# Altium PCB Glucometer-I.C.- Full V1.PcbDoc
Units mm, origin at the board's own origin, x right, y up, seen from the top; angles counter-clockwise.
Board outline 38.25 x 38.25 mm, 2 copper layers (Top Layer, Bottom Layer); 27 components, 32 nets, 123 pads, 22 vias.
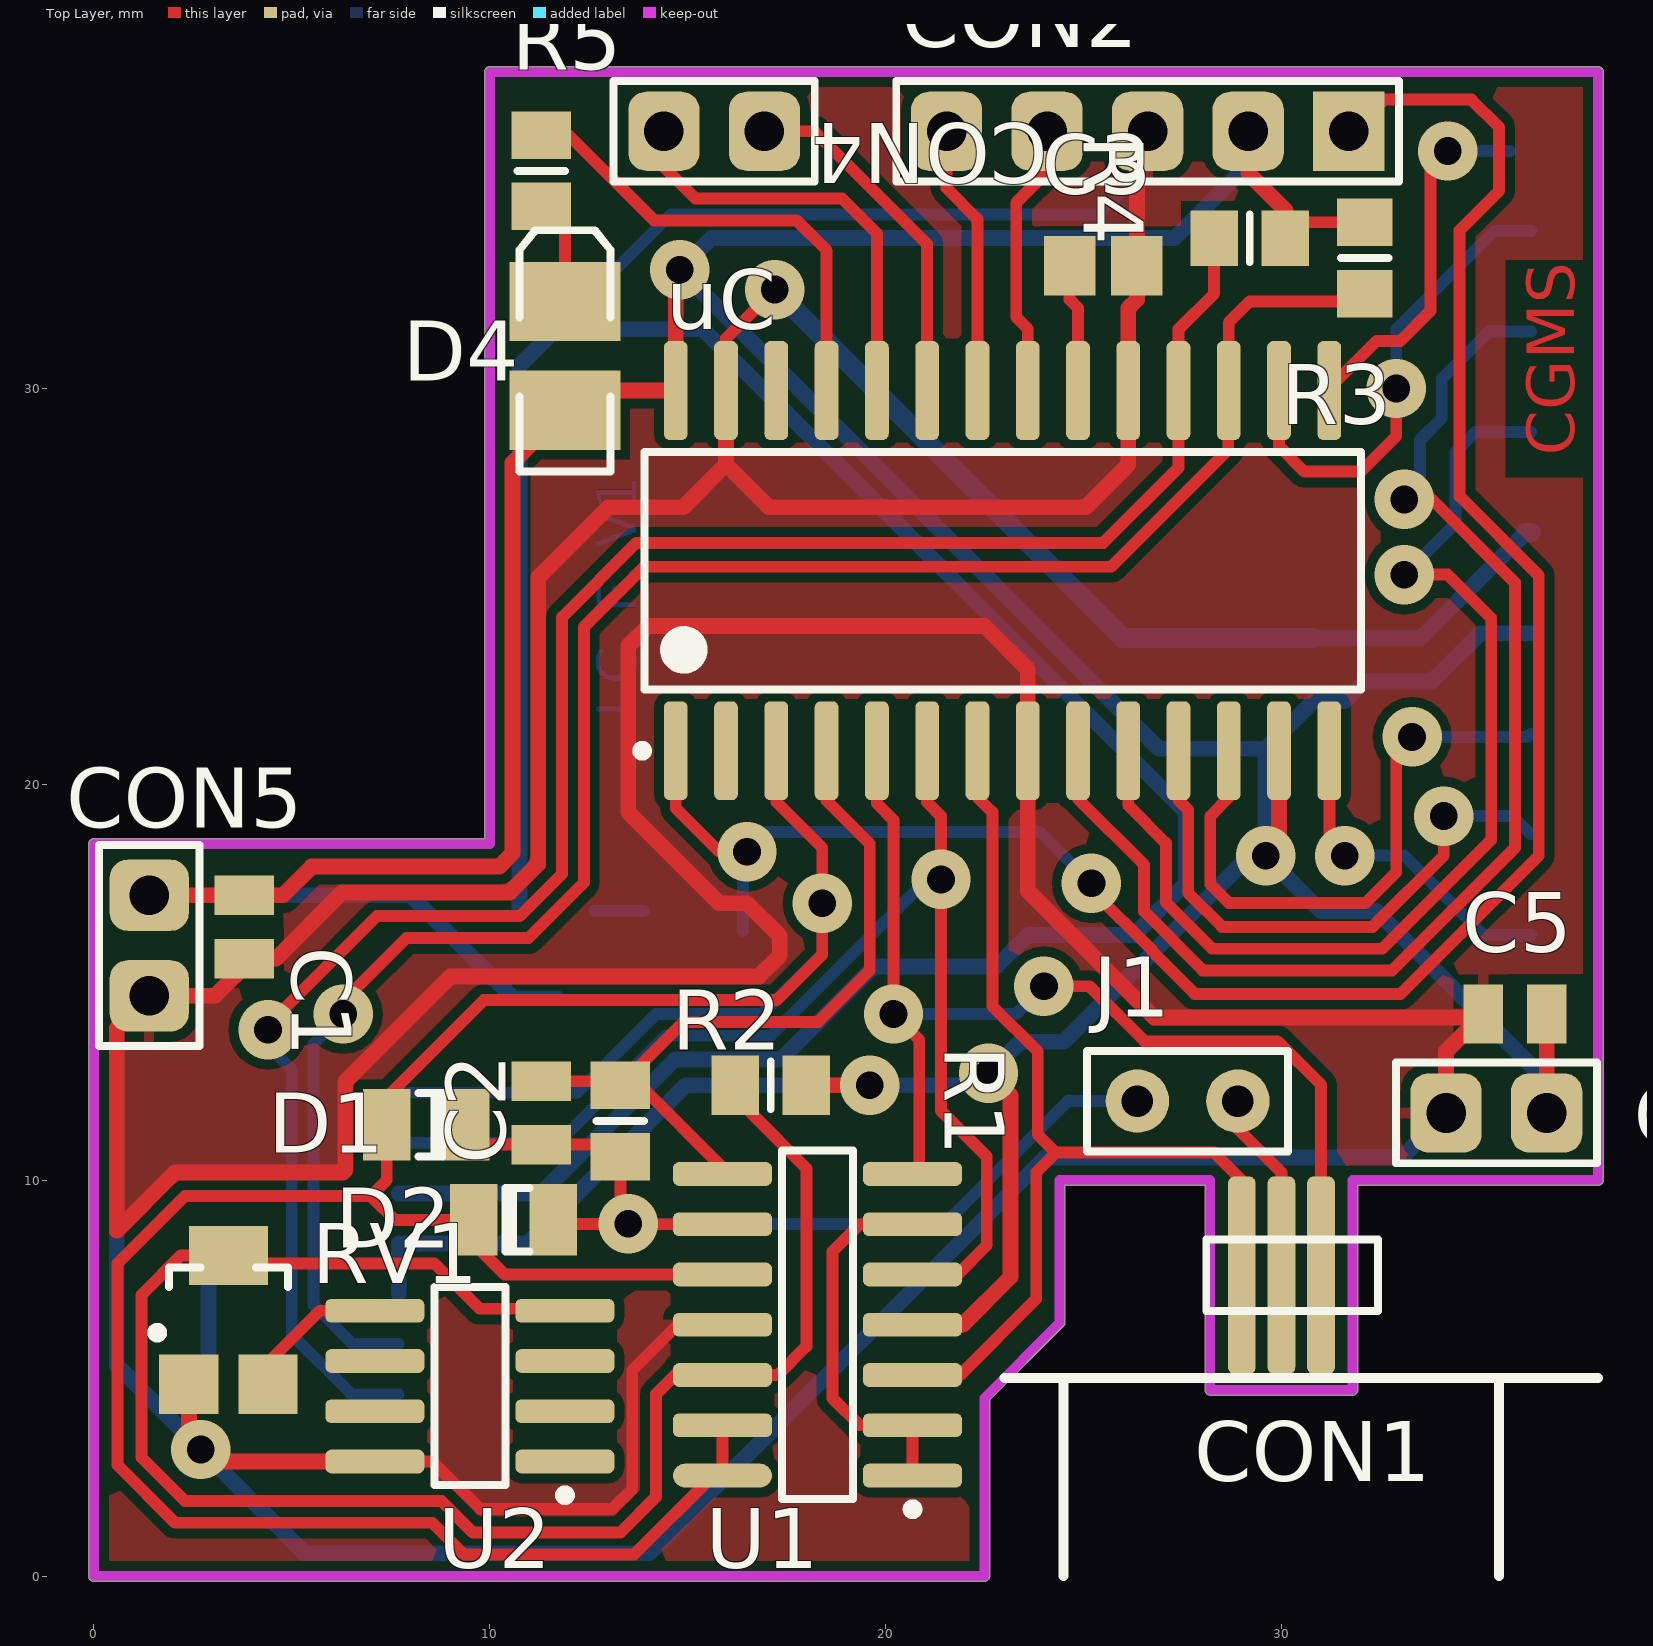
[diagram p0: Top Layer view]
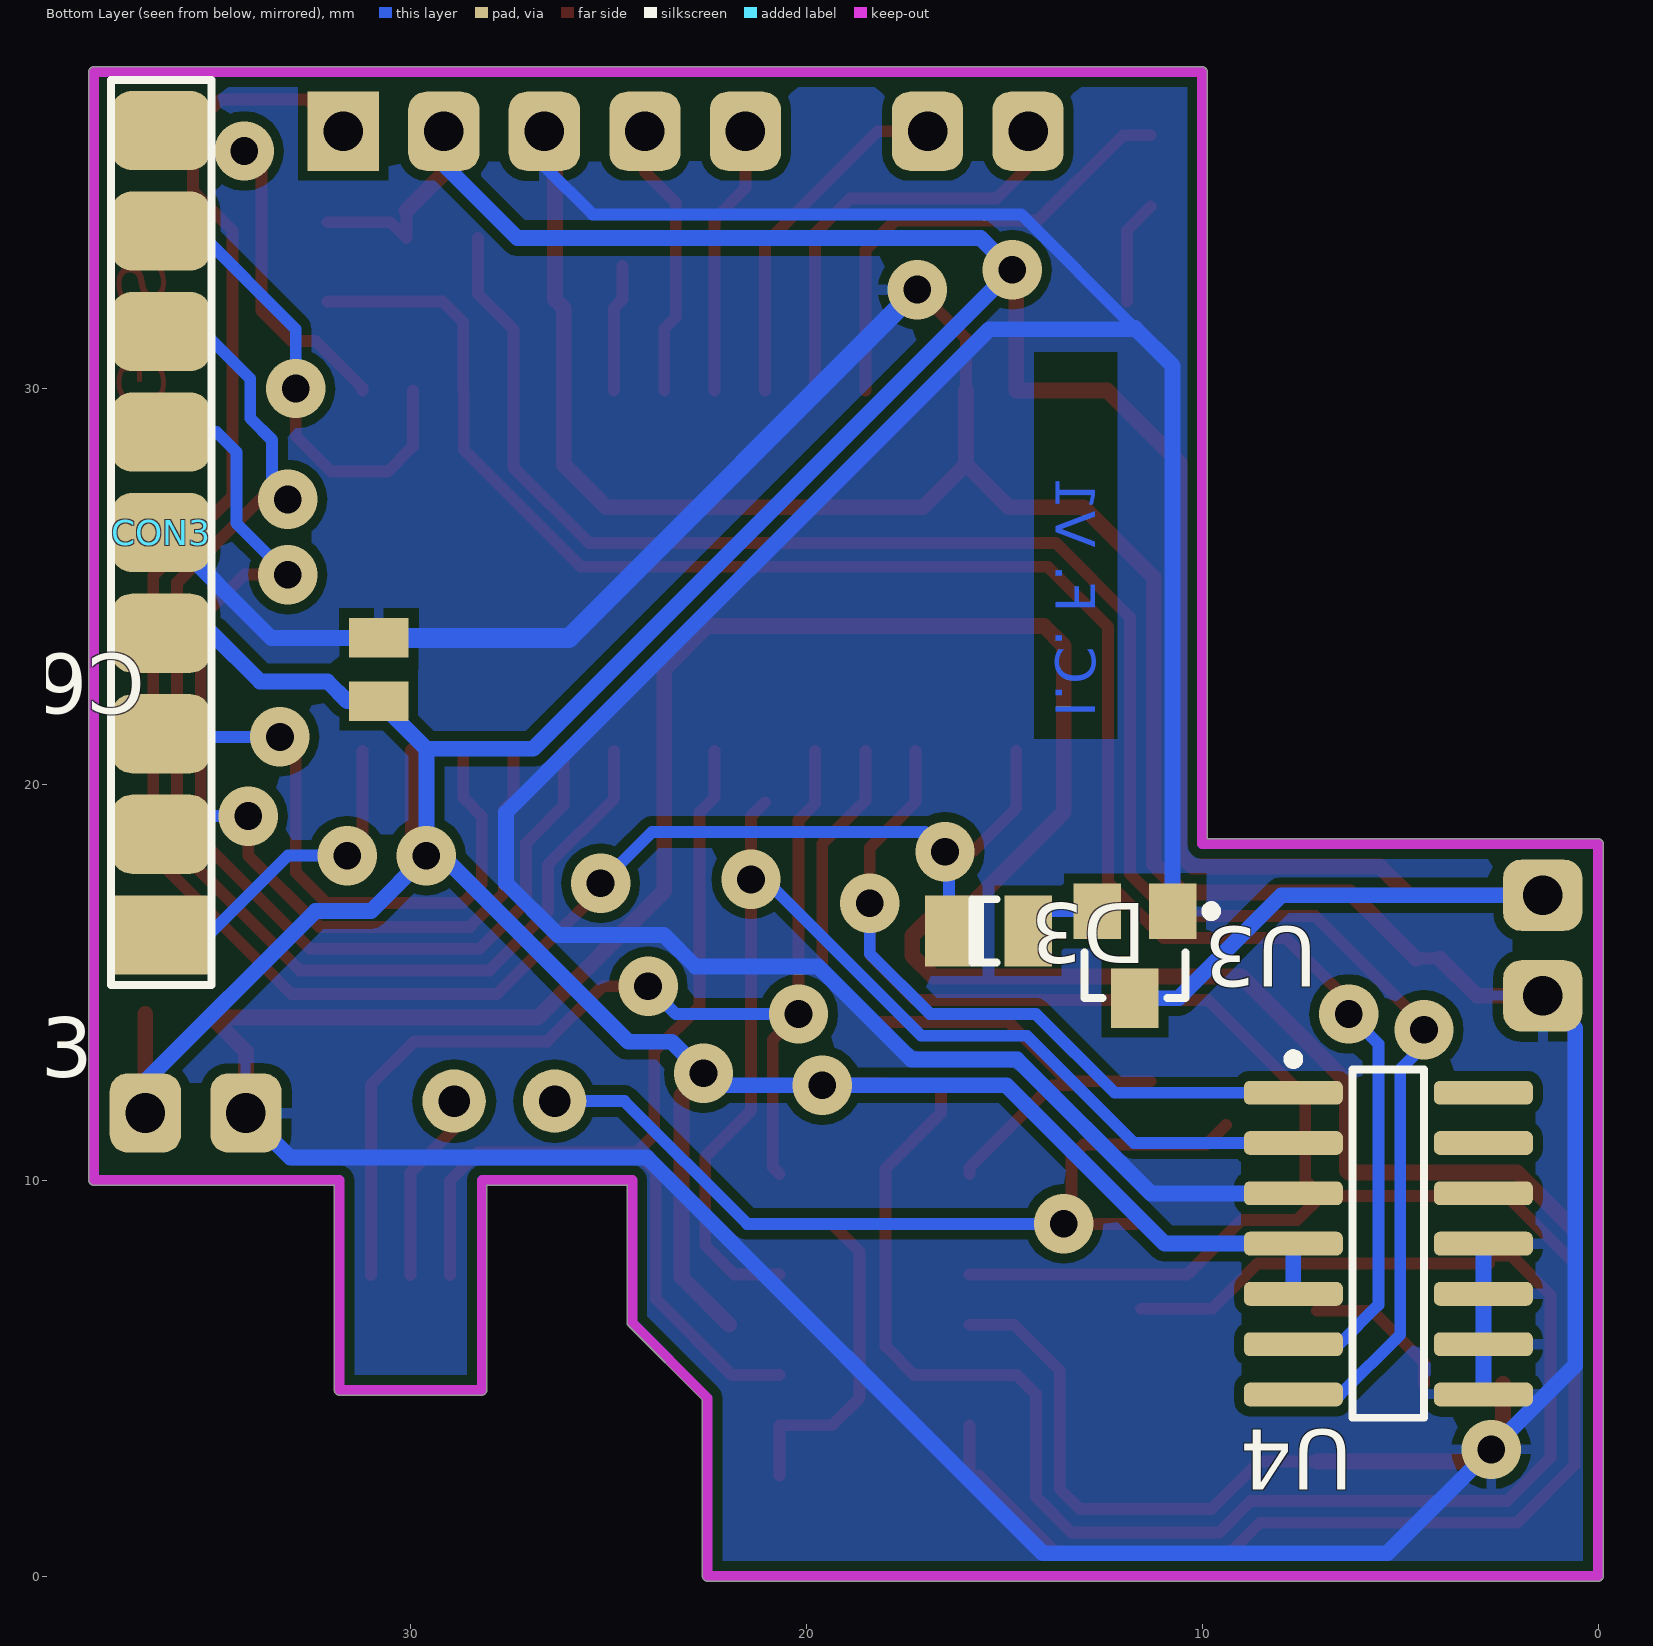
[diagram p1: Bottom Layer view, seen from below]

## Layer stack, top to bottom
Top Layer: signal copper 0.0356
Dielectric: dielectric 0.32, FR-4, Dk 4.8
Bottom Layer: signal copper 0.0356

## Board outline
-0.127,0 ccw(c0,0) 0,-0.127 22.5,-0.127 ccw(c22.5,0) 22.627,0 22.627,4.447 24.49,6.31 24.49,6.309 ccw(c24.4,6.4) 24.527,6.4 24.527,9.873 28.073,9.873 28.073,4.7 ccw(c28.2,4.7) 28.2,4.573 31.8,4.573 ccw(c31.8,4.7) 31.927,4.7 31.927,9.873 38,9.873 ccw(c38,10) 38.127,10 38.127,38 ccw(c38,38) 38,38.127 10,38.127 ccw(c10,38) 9.873,38 9.873,18.627 0,18.627 ccw(c0,18.5) -0.127,18.5

## Design rules (kind name [scope] priority, off if disabled: settings)
AssemblyTestPointUsage AssemblyTestPointUsage_1 [All] p2:
AssemblyTestpoint AssemblyTestpoint_1 [All] p2: testpointundercomponent=TRUE minsize=1.016 maxsize=2.54 preferedsize=1.524 minholesize=0 maxholesize=1.016 preferedholesize=0.813 testpointgrid=0.025 usegrid=TRUE gridtolerance=0 allowsidetop=TRUE allowsidebottom=TRUE
Clearance [All] p1: gap=0.25
ComponentClearance ComponentClearance_1 [All] p2: gap=0.254 collisioncheckmode=3 verticalgap=0.254 showdistances=FALSE
DiffPairsRouting DiffPairsRouting_1 [All] p2: maxlimit=0.254 minlimit=0.254 mostfreqgap=0.254 maxuncoupledlength=12.7
FabricationTestPointUsage TestPointUsage [All] p2: valid=0 allowmultiple=FALSE
FabricationTestpoint Testpoint [All] p2: side=3 testpointundercomponent=TRUE minsize=1.016 maxsize=2.54 preferedsize=1.524 minholesize=0 maxholesize=1.016 preferedholesize=0.813 testpointgrid=0.025 allowsidetop=TRUE allowsidebottom=TRUE usegrid=TRUE gridtolerance=0
FanoutControl Fanout_LCC [IsLCC] p1: bgadir=Out bgaviamode=Centered fanoutstyle=Auto fanoutdirection=Alternating viagrid=0.025 // Fanout_LCC (Default Rule)
FanoutControl Fanout_BGA [IsBGA] p2: bgadir=Out bgaviamode=Centered fanoutstyle=Auto fanoutdirection=Alternating viagrid=0.025 // Fanout_BGA (Default Rule)
FanoutControl Fanout_Default [All] p4: bgadir=Out bgaviamode=Centered fanoutstyle=Auto fanoutdirection=Alternating viagrid=0.025 // Fanout_Default (Default Rule)
FanoutControl Fanout_Small [(CompPinCount < 5)] p5: bgadir=Out bgaviamode=Centered fanoutstyle=Auto fanoutdirection=OutThenIn viagrid=0.025 // Fanout_Small (Default Rule)
FanoutControl Fanout_BGA_1 [IsBGA] p6: bgadir=Out bgaviamode=Centered fanoutstyle=Auto fanoutdirection=Alternating viagrid=0.025 // Fanout_BGA (Default Rule)
FanoutControl Fanout_LCC_1 [IsLCC] p7: bgadir=Out bgaviamode=Centered fanoutstyle=Auto fanoutdirection=Alternating viagrid=0.025 // Fanout_LCC (Default Rule)
FanoutControl Fanout_SOIC_1 [IsSOIC] p8: bgadir=Out bgaviamode=Centered fanoutstyle=Auto fanoutdirection=Alternating viagrid=0.025 // Fanout_SOIC (Default Rule)
FanoutControl Fanout_Small_1 [(CompPinCount < 5)] p9: bgadir=Out bgaviamode=Centered fanoutstyle=Auto fanoutdirection=OutThenIn viagrid=0.025 // Fanout_Small (Default Rule)
FanoutControl Fanout_Default_1 [All] p10: bgadir=Out bgaviamode=Centered fanoutstyle=Auto fanoutdirection=Alternating viagrid=0.025 // Fanout_Default (Default Rule)
Height Height_1 [All] p2: minheight=0 maxheight=25.4 prefheight=12.7
HoleSize [All] p1: absolutevalues=TRUE maxlimit=5 minlimit=0.025 maxpercent=80.000 minpercent=20.000
HoleSize HoleSize_1 [All] p2: absolutevalues=TRUE maxlimit=5 minlimit=0.025 maxpercent=80.000 minpercent=20.000
HoleToHoleClearance HoleToHoleClearance_1 [All] p2: gap=0.254 allowstackedmicrovias=TRUE
LayerPairs LayerPairs_1 [All] p2: enforce=TRUE
MinimumSolderMaskSliver MinimumSolderMaskSliver_1 [All] p2: minsoldermaskwidth=0.254
NetAntennae NetAntennae_1 [All] p2: netantennaetolerance=0
PasteMaskExpansion PasteMaskExpansion_1 [All] p2: expansion=0
PlaneClearance PlaneClearance_1 [All] p2: clearance=0.508
PolygonConnect [All] p1: connectstyle=Relief reliefconductorwidth=0.254 reliefentries=4 polygonreliefangle="90 Angle" airgapwidth=0.254
PolygonConnect PolygonConnect_1 [All] p2: connectstyle=Relief reliefconductorwidth=0.254 reliefentries=4 polygonreliefangle="90 Angle" airgapwidth=0.254
RoutingPriority RoutingPriority_1 [All] p2: routingpriority=0
RoutingTopology RoutingTopology_1 [All] p2: topology=Shortest
RoutingVias [All] p1: holewidth=0.8 width=1.5 viastyle="Through Hole" minholewidth=0.7 minwidth=1 maxholewidth=1 maxwidth=2
ShortCircuit ShortCircuit_1 [All] p2: allowed=FALSE
SilkToSilkClearance SilkToSilkClearance_1 [All] p2: silktosilkclearance=0.254
SilkToSolderMaskClearance SilkscreenOverComponentPads [IsPad] p2: minsilkscreentomaskgap=0.254 clearancetoexposedcopper=TRUE
SolderMaskExpansion [All] p1: expansion=0.102
SolderMaskExpansion SolderMaskExpansion_1 [All] p2: expansion=0.102
UnRoutedNet UnRoutedNet_1 [All] p2:
Width [All] p1: maxlimit=5 minlimit=0.25 preferedwidth=0.3 minimp=50.000000 maximp=50.000000 favimp=50.000000
23 further rules are at their usual default settings.

## Components (designator, comment, footprint, x,y, rotation, side; value= is the part's Value field where it differs from the comment)
C1 "Cap2" CAPC1608N 3.8,16.4 r270 top
C2 "Cap2" CAPC1608N 11.3,11.7 r90 top
C3 "Cap" CAPC2012N 25.5,33.1 r180 top
C5 "Cap" CAPC1608N 35.9,14.2 r0 top
C6 "Cap" CAPC1608N 30.8,22.9 r270 bottom
CON1 "MHDR1X3" MHDR1X3 29,7.6 r0 top
CON2 "Header 5" HDR1X5 31.7,36.5 r180 top
CON3 "Header 9" HDR1X9 36.3,16.2 r90 bottom
CON4 "Header 2" HDR1X2#1 14.4,36.5 r0 top
CON5 "Header 2" HDR1X2#1 1.4,17.2 r270 top
CON6 "Header 2" HDR1X2#1 36.7,11.7 r180 top
D1 "1N4148" CD3216-1206#1 8.5,11.4 r0 top
D2 "1N4148" CD3216-1206#2 10.7,9 r180 top
D3 "1N4148" CD3216-1206#1 15.5,16.3 r0 bottom
D4 "LED2" 3.2X1.6X1.1 11.9,30.8 r90 top
J1 "Header 2" HDR1X2#2 28.9,12 r180 top
R1 "Res1" RESC2012N#1 17.1,12.4 r0 top
R2 "Res1" RESC2012N#1 13.3,11.5 r270 top
R3 "Res1" RESC2012N#2 32.1,33.3 r270 top
R4 "Res1" RESC2012N#2 29.2,33.8 r180 top
R5 "Res1" RESC2012N#1 11.3,35.5 r270 top
RV1 "RPot" SOT23-3N 3.4,7.1 r90 top
U1 "LMC6044IN" M14A_N 18.28,6.35 r180 top
U2 "LM385BM" M08A_N 9.5,4.8 r180 top
U3 "Supply Voltage Supervisor" SOT23 11.7,15.7 r0 bottom
U4 "AD5241" R-14_N 5.3,8.4 r180 bottom
uC "PIC24FJ64GA102-I/SO" SOIC-SO28_N 22.955,25.4 r90 top

## Footprints (in the part's own frame and the unit in brackets; to place one, negate y for a bottom-side part, rotate by r counter-clockwise, add the part's x,y. Pads: shape width x height; smd on the part's side, far side on the other; paste and mask are expansions set on the pad)
3.2X1.6X1.1 [mm] "SMT LED; 2 Flat Leads"
  rect 2x2.8 smd: 1(-1.35,0) 2(1.4,0)
  silkscreen extent -2.9,-1.15 3.2,1.15
CAPC1608N [mm] "Chip Capacitor, Body 1.6x0.8mm, IPC Medium Density"
  rect 1x1.5 smd: 1(-0.8,0) 2(0.8,0)
  body extent -0.87,-0.48 0.87,0.48, height 0.85
CAPC2012N [mm] "Chip Capacitor, Body 2.0x1.3mm, IPC Medium Density"
  rect 1.3x1.5 smd: 1(-0.85,0) 2(0.85,0)
  body extent -1.1,-0.72 1.1,0.72, height 1.1
CD3216-1206#1 [mm] "Chip Diode; Body 3.2 x 1.6 mm (LxW typ)"
  rect 1.2x1.8 smd: 1(-1.1,0) 2(0.9,0)
  silkscreen extent -0.3,-0.8 0.3,0.8
CD3216-1206#2 [mm] "Chip Diode; Body 3.2 x 1.6 mm (LxW typ)"
  rect 1.2x1.8 smd: 1(-0.9,0) 2(1.1,0)
  silkscreen extent -0.3,-0.8 0.3,0.8
HDR1X2#1 [mm] "Connector; Header; 2 Position"
  rrect50% 1.8x2 hole 1: 1(0,0) 2(2.54,0)
  silkscreen extent -1.27,-1.27 3.81,1.27
HDR1X2#2 [mm] "Connector; Header; 2 Position"
  round 1.6 hole 0.8: 1(0,0) 2(2.54,0)
  silkscreen extent -1.27,-1.27 3.81,1.27
HDR1X5 [mm] "Connector; Header; 5 Position"
  rect 1.8x2 hole 1: 1(0,0)
  rrect50% 1.8x2 hole 1: 2(2.54,0) 3(5.08,0) 4(7.62,0) 5(10.16,0)
  silkscreen extent -1.27,-1.27 11.43,1.27
HDR1X9 [mm] "Connector; Header; 9 Position"
  rect 2x2.5 smd: 1(0,0)
  rrect50% 2x2.5 smd: 2(2.54,0) 3(5.08,0) 4(7.62,0) 5(10.16,0) 6(12.7,0) 7(15.24,0) 8(17.78,0) 9(20.32,0)
  silkscreen extent -1.27,-1.27 21.59,1.27
M08A_N [mm] "SOIC, 8-Leads, Body 4.9x3.9mm, Pitch 1.27mm, IPC Medium Density"
  rrect50% 2.5x0.6 smd: 1(-2.4,1.905) 2(-2.4,0.635) 3(-2.4,-0.635) 4(-2.4,-1.905) 5(2.4,-1.905) 6(2.4,-0.635) 7(2.4,0.635) 8(2.4,1.905)
  silkscreen extent -2.53,-2.5 0.9,2.88, body extent -2,-2.5 2,2.5, height 1.75
M14A_N [mm] "SOIC, 14-Leads, Body 8.6x3.9mm, Pitch 1.27mm, IPC Medium Density"
  rrect50% 2.5x0.6 smd: 1(-2.4,3.81) 2(-2.4,2.54) 3(-2.4,1.27) 4(-2.4,0) 5(-2.4,-1.27) 6(-2.4,-2.54) 7(-2.4,-3.81) 8(2.4,-3.81) 9(2.4,-2.54) 10(2.4,-1.27) 11(2.4,0) 12(2.4,1.27) 13(2.4,2.54)
  oval 2.5x0.6 smd: 14(2.4,3.81)
  silkscreen extent -2.53,-4.4 0.9,4.78, body extent -2,-4.38 2,4.38, height 1.75
MHDR1X3 [mm] "Connector; Header; 3 Position"
  rrect50% 0.7x5 smd: 1(0,0) 2(1,0) 3(2,0)
  silkscreen extent -0.9,-0.9 3.44,0.9
R-14_N [mm] "14-Pin Narrow Body Small Outline Integrated Circuit 1.27 mm Pitch, IPC Medium Density"
  rrect50% 2.5x0.6 smd: 1(-2.4,3.81) 2(-2.4,2.54) 3(-2.4,1.27) 4(-2.4,0) 5(-2.4,-1.27) 6(-2.4,-2.54) 7(-2.4,-3.81) 8(2.4,-3.81) 9(2.4,-2.54) 10(2.4,-1.27) 11(2.4,0) 12(2.4,1.27) 13(2.4,2.54) 14(2.4,3.81)
  silkscreen extent -2.53,-4.4 0.9,4.78, body extent -1.95,-4.33 1.95,4.33, height 1.75
RESC2012N#1 [mm] "Chip Resistor, Body 2.0x1.3mm, IPC Medium Density"
  rect 1.2x1.5 smd: 1(-0.9,0) 2(0.9,0)
  silkscreen extent 0,-0.6 0,0.6, body extent -1.07,-0.7 1.07,0.7, height 0.65
RESC2012N#2 [mm] "Chip Resistor, Body 2.0x1.3mm, IPC Medium Density"
  rect 1.2x1.4 smd: 1(-0.9,0) 2(0.9,0)
  silkscreen extent 0,-0.6 0,0.6, body extent -1.07,-0.7 1.07,0.7, height 0.65
SOIC-SO28_N [mm] "SOIC, 28-Leads, Body 17.9x7.5mm, Pitch 1.27mm, IPC Medium Density"
  rrect50% 2.5x0.6 smd: 1(-4.55,8.255) 2(-4.55,6.985) 3(-4.55,5.715) 4(-4.55,4.445) 5(-4.55,3.175) 6(-4.55,1.905) 7(-4.55,0.635) 8(-4.55,-0.635) 9(-4.55,-1.905) 10(-4.55,-3.175) 11(-4.55,-4.445) 12(-4.55,-5.715) 13(-4.55,-6.985) 14(-4.55,-8.255) 15(4.55,-8.255) 16(4.55,-6.985) 17(4.55,-5.715) 18(4.55,-4.445) 19(4.55,-3.175) 20(4.55,-1.905) 21(4.55,-0.635) 22(4.55,0.635) 23(4.55,1.905) 24(4.55,3.175) 25(4.55,4.445) 26(4.55,5.715) 27(4.55,6.985) 28(4.55,8.255)
  silkscreen extent -4.67,-9.05 3,9.23, body extent -3.8,-9.06 3.8,9.06, height 2.65
SOT23 [mm] "SOT-23; 3 Leads; Body 3.0 x 2.6 mm, inc. leads (LxW max)"
  rect 1.2x1.4 smd: 1(-0.95,-1.1) 2(0.95,-1.1)
  rect 1.2x1.5 smd: 3(0,1.1)
  silkscreen extent -2.05,-1.22 1.28,1.1
SOT23-3N [mm] "SOT23, 3-Leads, Body 2.9x1.3mm, Pitch 0.95mm, Lead Span 2.5mm, IPC Medium Density"
  rect 1.5x1.5 smd: 1(-2.25,1) 2(-2.25,-1)
  rect 1.5x2 smd: 3(1,0)
  silkscreen extent -1.07,-1.5 0.7,1.92, body extent -0.7,-1.5 0.7,1.5, height 1.1

## Part data
C1 C2 C3 C5 C6: "Capacitor"
CON1: "Header, 3-Pin"
CON2: "Header, 5-Pin"
CON3: "Header, 9-Pin"
CON4 CON5 CON6 J1: "Header, 2-Pin"
D1 D2 D3: "High Conductance Fast Diode"
D4: "Typical RED, GREEN, YELLOW, AMBER GaAs LED"
R1 R2 R3 R4 R5: "Resistor"
RV1: "Potentiometer"
U1: "CMOS Quad Micropower Operational Amplifier, 14-pin MDIP"
U2: "Adjustable Micropower Voltage Reference, 8-pin Narrow SOIC"
U4: "AD5241BR"
uC: "General purpose 16-bit Flash Microcontroller with nanoWatt XLP, 64KB Flash, 8KB SRAM, 28-Pin SOIC, Industrial Temperature"

## Via types
v1: diameter 1.5, hole 0.7, Top Layer to Bottom Layer, 22 vias

## Nets (pads, with @x,y where several pads share a name; then routed paths per layer and width w, separated by ;. In a path a pad name is that pad's centre, name@x,y a point inside that pad or via, vN(x,y) a via of type N, cw(c..) or ccw(c..) an arc to the next point about the centre after c; other vN are vias at no path point)
3.3V: C1.1 C5.2 C6.2 CON2.2 CON3.4 CON5.1 CON6.1 D4.1 R1.2 R3.1 R4.1 U1.4 U3.3 U4.4 U4.5 uC.13 uC.28 | length 142.3
  Top Layer w0.3: 29.16,35.44 CON2.2 ; 30.1,34.5 R4.1 30.5,34.2 R3.1
  Top Layer w0.4: CON5.1 4,17.2 4.777,17.2 5.5,17.923 10.239,17.923 10.577,18.261 10.577,28.127 D4.1 12.4,29.95 uC.28 14.7,32.9 v1(14.8,33) ; R1.2 v1(19.6,12.4) ; 21.95,6.35 23.155,7.555 23.155,12.145 v1(22.6,12.7) ; 29.16,35.44 30.1,34.5 ; v1(29.6,18.2) 29.94,18.54 uC.13 ; CON6.1 C5.2
  Bottom Layer w0.4: CON5.1 8,17.2 10.6,14.6 U3.3 ; U4.5 U4.4 10.949,8.4 14.949,12.4 v1(19.6,12.4) 22.3,12.4 v1(22.6,12.7) 23.4,13.5 24.5,13.5 29.2,18.2 v1(29.6,18.2) ; CON2.2 29.16,35.66 27.3,33.8 15.6,33.8 v1(14.8,33) 26.9,20.9 29.6,20.9 ; CON3.4 35.02,23.82 33.8,22.6 32.1,22.6 31.6,22.1 C6.2 29.6,20.9 ; CON6.1 36.7,12.5 32.4,16.8 31,16.8 v1(29.6,18.2) ; v1(29.6,18.2) 29.6,20.9
CNT: CON1.3 U1.7 uC.5 | length 28.1
  Top Layer w0.3: uC.5 19.78,19.52 20.2,19.1 v1(20.2,14.2) 20.85,13.55 20.85,10.33 U1.7 ; v1(24,14.9) 25.151,14.9 26.541,13.51 29.9,13.51 31,12.41 CON1.3
  Bottom Layer w0.3: v1(20.2,14.2) 23.3,14.2 v1(24,14.9)
CSCON: CON3.7 uC.9 | length 32.6
  Top Layer w0.3: uC.9 24.86,19.64 26.531,17.969 26.531,16.792 28,15.322 28,15.3 32.8,15.3 35.9,18.4 35.9,25.1 33.8,27.2 v1(33.1,27.2)
  Bottom Layer w0.3: v1(33.1,27.2) 33.5,27.6 33.5,28.7 34.05,29.25 34.05,30.25 35.24,31.44 CON3.7
CSDATA: CON3.3 uC.12 | length 14.8
  Top Layer w0.3: uC.12 28.67,19.67 28.2,19.2 28.2,17.478 28.678,17 32.122,17 32.9,17.778 v1@32.9,20.77
  Bottom Layer w0.3: v1(33.3,21.2) 36.22,21.2 CON3.3
GND: C1.2 C3.1 C5.1 C6.1 CON2.3 CON3.5 CON5.2 CON6.2 RV1.1 U1.11 U2.8 U3.1 U4.3 U4.8 U4.9 U4.10 U4.11 uC.8 uC.19 uC.27 | length 292.7
  Top Layer w0.3: C1.2@4,15.6 4.6,15.6 ; U2.8 8.56,2.895 9.755,1.7 13.1,1.7 13.6,2.2 13.6,5.2 14.75,6.35 U1.11 ; uC.27 15.97,31.27 v1(17.2,32.5) ; CON2.3@26.35,36.23 CON2.3
  Top Layer w0.4: RV1.1 2.4,3.5 v1(2.7,3.2) ; v1@3.005,2.895 U2.8 ; C1.2@4,15.6 3.06,14.66 CON5.2 0.577,13.837 0.577,8.726 2.051,10.2 6.3,10.2 6.35,10.25 6.35,12.486 9.014,15.15 16.8,15.15 17.326,15.676 17.326,16.174 16.5,17 15.8,17 13.5,19.3 13.5,23.5 14,24 22.5,24 23.59,22.91 uC.8 23.59,17.31 26.79,14.11 35.01,14.11 34.16,13.26 CON6.2 ; 4.6,15.6 6.273,17.273 10.508,17.273 11.227,17.992 11.227,25.227 13,27 14.885,27 15.97,28.085 ; uC.27 15.97,28.085 ; CON2.3@26.35,36.23 C3.1 26.35,32.25 26.13,32.03 uC.19 26.13,28.075 25.055,27 17.055,27 15.97,28.085
  Bottom Layer w0.3: 11.7,31.526 14.574,34.4 25.4,34.4 26.62,35.62 CON2.3
  Bottom Layer w0.4: CON5.2 0.577,13.837 0.577,5.323 v1(2.7,3.2) 5.323,0.577 14.026,0.577 24.026,10.577 33.037,10.577 CON6.2 ; U4.8 U4.9 U4.10 U4.11 ; U4.3 11.299,9.67 14.679,13.05 17.353,13.05 19.703,15.4 22.803,15.4 23.603,16.2 26.281,16.2 27.59,17.51 27.59,19.29 15.381,31.5 11.726,31.5 11.7,31.526 10.75,30.576 U3.1 ; C6.1 33.516,23.7 CON3.5@36.176,26.36
  Bottom Layer w0.5: v1(17.2,32.5) 26,23.7 C6.1 ; CON3.5@36.176,26.36 CON3.5
IRQ1: CON3.1 uC.14 | length 8.3
  Top Layer w0.3: uC.14 31.21,18.59 v1(31.6,18.2)
  Bottom Layer w0.3: v1(31.6,18.2) 33.1,18.2 35.1,16.2 CON3.1
LED1: R5.1 uC.25 | length 12
  Top Layer w0.3: R5.1 12,36.4 14.15,34.25 17.75,34.25 18.51,33.49 uC.25
MCLR: CON2.1 D3.2 uC.1 | length 53.2
  Top Layer w0.3: uC.1 14.7,19.4 15.8,18.3 v1(16.5,18.3) ; v1(25.2,17.5) 25.2,17.344 26.745,15.799 26.745,15.77 27.805,14.71 33.01,14.71 36.5,18.2 36.5,25.278 34.5,27.278 34.5,34 35.5,35 35.5,36.6 34.8,37.3 32.6,37.3 CON2.1@31.7,36.4
  Bottom Layer w0.3: D3.2 v1@16.4,18.2 ; v1(16.5,18.3) 17,18.8 23.9,18.8 v1(25.2,17.5)
NetC3_2: C3.2 uC.20 | length 3.2
  Top Layer w0.3: C3.2 24.65,32.25 24.86,32.04 uC.20
NetD3_1: D3.1 U3.2 | length 1.3
  Bottom Layer w0.3: U3.2 D3.1@13.9,16.8
NetD4_2: D4.2 R5.2 | length 2.6
  Top Layer w0.3: R5.2 11.9,34 D4.2
NetR1_1: R1.1 RV1.3 U1.12 U2.4 | length 43.4
  Top Layer w0.3: RV1.3@2.755,7.9 8.6,7.9 9.745,6.755 U2.4@11.555,6.755 ; RV1.3@2.755,8.1 2.2,8.1 1.2,7.1 1.2,3 2.3,1.9 8.777,1.9 9.577,1.1 13.3,1.1 14.2,2 14.2,4.6 14.68,5.08 U1.12 17.275,5.08 18,5.805 18,10.3 16.6,11.7 R1.1@16.6,12.2
NetRV1_3: RV1.2 U2.5 | length 3.8
  Top Layer w0.3: RV1.2 4.4,5.4 5.705,6.705 U2.5
NetU1_1: U1.1 U1.2 U1.6 | length 9.6
  Top Layer w0.3: U1.1 U1.2 19.345,3.81 18.655,4.5 18.655,8.2 19.345,8.89 U1.6
NetuC_2: uC.2
NetuC_26: uC.26
PEGC2: CON2.5 uC.22 | length 6.9
  Top Layer w0.3: CON2.5 21.54,35.06 22.32,34.28 uC.22
PEGD2: CON2.4 uC.21 | length 7
  Top Layer w0.3: uC.21 23.59,31.51 23.3,31.8 23.3,34.7 24.08,35.48 CON2.4
REF: CON1.1 U1.3 uC.7 | length 26.2
  Top Layer w0.3: U1.3 21.88,5.08 23.805,7.005 23.805,10.205 24.3,10.7 ; uC.7 22.32,19.68 22.7,19.3 22.7,14.4 23.845,13.255 23.845,11.155 24.3,10.7 ; CON1.1 29,10 28.3,10.7 24.3,10.7
RESET: CON3.6 uC.10 | length 28.1
  Top Layer w0.3: uC.10 26.13,19.47 27.081,18.519 27.081,17.019 28.25,15.85 32.55,15.85 35.3,18.6 35.3,24.2 34.2,25.3 v1(33.1,25.3)
  Bottom Layer w0.3: v1(33.1,25.3) 34.4,26.6 34.4,28.4 34.9,28.9 CON3.6
SCK: CON3.9 uC.15 | length 9.2
  Top Layer w0.3: uC.15 31.21,30.01 32.4,31.2 33,31.2 33.766,31.966 33.766,35.566 v1(34.2,36)
  Bottom Layer w0.3: v1(34.2,36) CON3.9@35.78,36
SCL1: R3.2 U4.6 uC.17 | length 49.3
  Top Layer w0.3: v1(6.3,14.2) 6.3,14.523 7.9,16.123 10.985,16.123 12.377,17.515 12.377,23.977 13.9,25.5 25.7,25.5 28.655,28.455 uC.17@28.655,29.935 ; uC.17 28.67,31.67 29.2,32.2 R3.2@32.1,32.2
  Bottom Layer w0.3: v1(6.3,14.2) 5.55,13.45 5.55,6.85 6.54,5.86 U4.6
SDA1: R4.2 U4.7 uC.18 | length 50.2
  Top Layer w0.3: v1(4.4,13.8) 4.4,13.926 7.147,16.673 10.757,16.673 11.827,17.743 11.827,24.227 13.7,26.1 25.5,26.1 27.4,28 uC.18 27.4,31.5 28.3,32.4 R4.2
  Bottom Layer w0.3: v1(4.4,13.8) 4.4,13.4 5,12.8 5,6.1 6.51,4.59 U4.7
SDI: CON3.8 uC.16 | length 12.1
  Top Layer w0.3: uC.16 29.94,28.54 30.58,27.9 32,27.9 32.9,28.8 v1(32.9,30)
  Bottom Layer w0.3: v1(32.9,30) 32.9,31.5 35.38,33.98 CON3.8
SDO: CON3.2 uC.11 | length 14.6
  Top Layer w0.3: uC.11 27.4,19.6 27.645,19.355 27.645,17.255 28.5,16.4 32.3,16.4 34.1,18.2 v1(34.1,19.2)
  Bottom Layer w0.3: v1(34.1,19.2) 35.84,19.2 CON3.2
U1RX: CON4.2 uC.23 | length 9
  Top Layer w0.3: CON4.2 18.2,36.5 21.05,33.65 uC.23
U1TX: CON4.1 uC.24 | length 10.9
  Top Layer w0.3: CON4.1 14.4,35.6 15.2,34.8 18.9,34.8 19.78,33.92 uC.24
VCTRL: U1.5 U4.2 uC.6 | length 30.1
  Top Layer w0.3: U1.5 21.82,7.62 22.555,8.355 22.555,10.6 21.4,11.755 v1(21.4,17.6) 21.4,19.2 21.05,19.55
  Bottom Layer w0.3: U4.2 11.721,10.94 14.431,13.65 17.104,13.65 v1@21.054,17.6
VGND: D1.1 D2.2 U1.10 U1.13 U1.14 U4.1 uC.3 | length 74.4
  Top Layer w0.3: U1.13 U1.14 15.64,2.54 13.65,0.55 9.349,0.55 8.549,1.35 2.05,1.35 0.6,2.8 0.6,7.9 2.3,9.6 7,9.6 ; U1.10 10.38,7.62 9,9 7.6,9 7,9.6 ; uC.3 17.24,19.56 18.4,18.4 v1(18.4,17) 18.4,15.7 17.25,14.55 9.85,14.55 7.4,12.1 D1.1 7.4,10 7,9.6
  Bottom Layer w0.3: U4.1 12.213,12.21 14.203,14.2 16.877,14.2 18.4,15.723 v1(18.4,17)
VOUT: C2.2 R2.1 U1.8 uC.4 | length 19.1
  Top Layer w0.3: C2.2 13.2,12.5 R2.1 ; U1.8 15.88,10.32 13.8,12.4 R2.1 ; uC.4 18.51,19.59 19.6,18.5 19.6,15.3 18.3,14 14.9,14 R2.1
WRK: CON1.2 J1.1 | length 4.9
  Top Layer w0.3: J1.1 28.9,11.3 30,10.2 CON1.2
WRK-IN: C2.1 D1.2 D2.1 J1.2 R2.2 U1.9 | length 24.5
  Top Layer w0.3: D1.2 9.9,10.9 C2.1 13,10.9 R2.2 13.3,9.1 v1(13.5,8.9) ; D2.1 11.7,8.9 v1(13.5,8.9) ; U1.9 13.51,8.89 v1(13.5,8.9)
  Bottom Layer w0.3: v1(13.5,8.9) 21.5,8.9 24.6,12 J1.2
pads on no net: U2.1 U2.2 U2.3 U2.6 U2.7 U4.12 U4.13 U4.14

## Polygon pours and split planes (outlines as drawn)
GND on Top Layer "Bottom Layer-No Net" (solid, pour order 4): 10,38 38,38 38,10 31.8,10 24.4,10 24.4,6.4 22.5,4.5 22.5,0 0,0 0,18.5 10,18.5
GND on Bottom Layer "Bottom Layer-No Net" (solid, pour order 3): 10,38 38,38 38,10 31.8,10 31.8,4.7 28.2,4.7 28.2,10 24.4,10 24.4,6.4 22.5,4.5 22.5,0 22.2,0.3 0,0.3 0,18.5 10,18.5

## Keep-outs
Keep-Out Layer:
  lines w0.254: 0,15.9 0,0 ; 0,0 22.5,0 22.5,4.5 24.4,6.4 24.4,6.5 24.4,10 26,10 28.2,10 28.2,4.7 31.8,4.7 31.8,10 38,10 38,38 10,38 10,18.5 0,18.5 0,0

## Other copper
Top Layer:
  text "CGMS" at 37.4,28.3 h1.2 r90
Bottom Layer:
  text "I.C. F. V1" at 13.7,21.7 h1 r90

## Silkscreen, mask and mechanical layers (free items; w line width, h text height)
Top Overlay:
  lines w0.254: 23,5 38,5 ; 24.5,0 24.5,5 ; 35.5,0 35.5,5
Mechanical 16:
  lines w0.127: -132.175,-31.975 -127.095,-31.975 ; -132.175,22 -127.095,22 ; -132.175,75.975 -127.095,75.975 ; -62.325,-85.95 -62.325,-80.87 ; -62.325,124.87 -62.325,129.95 ; 7.525,-85.95 7.525,-80.87 ; 7.525,124.87 7.525,129.95 ; 77.375,-85.95 77.375,-80.87 ; 77.375,124.87 77.375,129.95 ; 142.145,-31.975 147.225,-31.975 ; 142.145,22 147.225,22 ; 142.145,75.975 147.225,75.975 ; -132.175,-85.95 -132.175,129.95 147.225,129.95 147.225,-85.95 -132.175,-85.95 ; -127.095,-80.87 142.145,-80.87 142.145,124.87 -127.095,124.87 -127.095,-80.87
  text "1" at -97.851,126.521 h1.78
  text "2" at -27.984,126.521 h1.78
  text "3" at 41.739,126.521 h1.78
  text "4" at 111.614,126.521 h1.78
  text "A" at -130.27,100.664 h1.78
  text "A" at 144.05,100.664 h1.78
  text "B" at 144.425,49.35 h1.78
  text "B" at -130.27,46.689 h1.78
  text "C" at -130.27,-7.286 h1.78
  text "C" at 144.05,-7.286 h1.78
  text "D" at -130.27,-61.134 h1.78
  text "D" at 144.05,-61.134 h1.78
  text "1" at -97.851,-84.299 h1.78
  text "2" at -27.984,-84.299 h1.78
  text "3" at 41.739,-84.299 h1.78
  text "4" at 111.614,-84.299 h1.78

## Dimensions
0,42 to 42,42 on Top Overlay